# EAGLE board avocado-rev01.OLD (EAGLE 9.3.1)
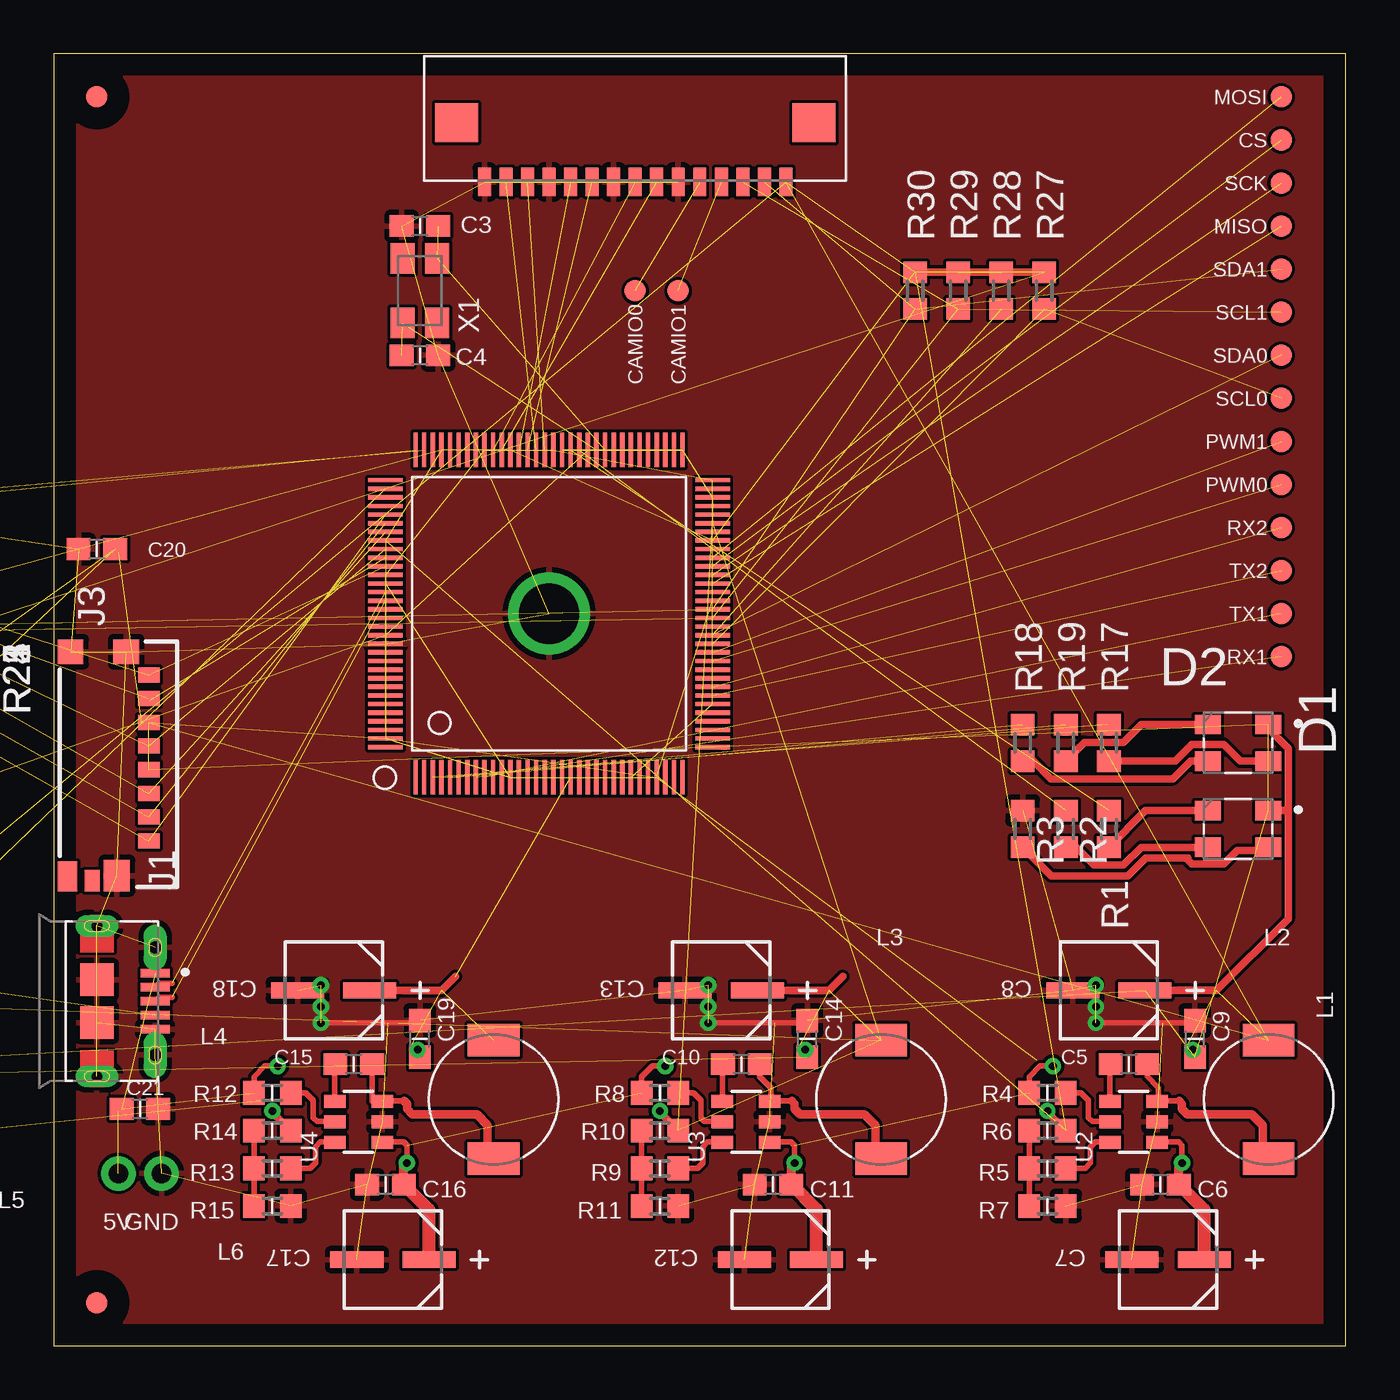
[diagram p0: board, top side]
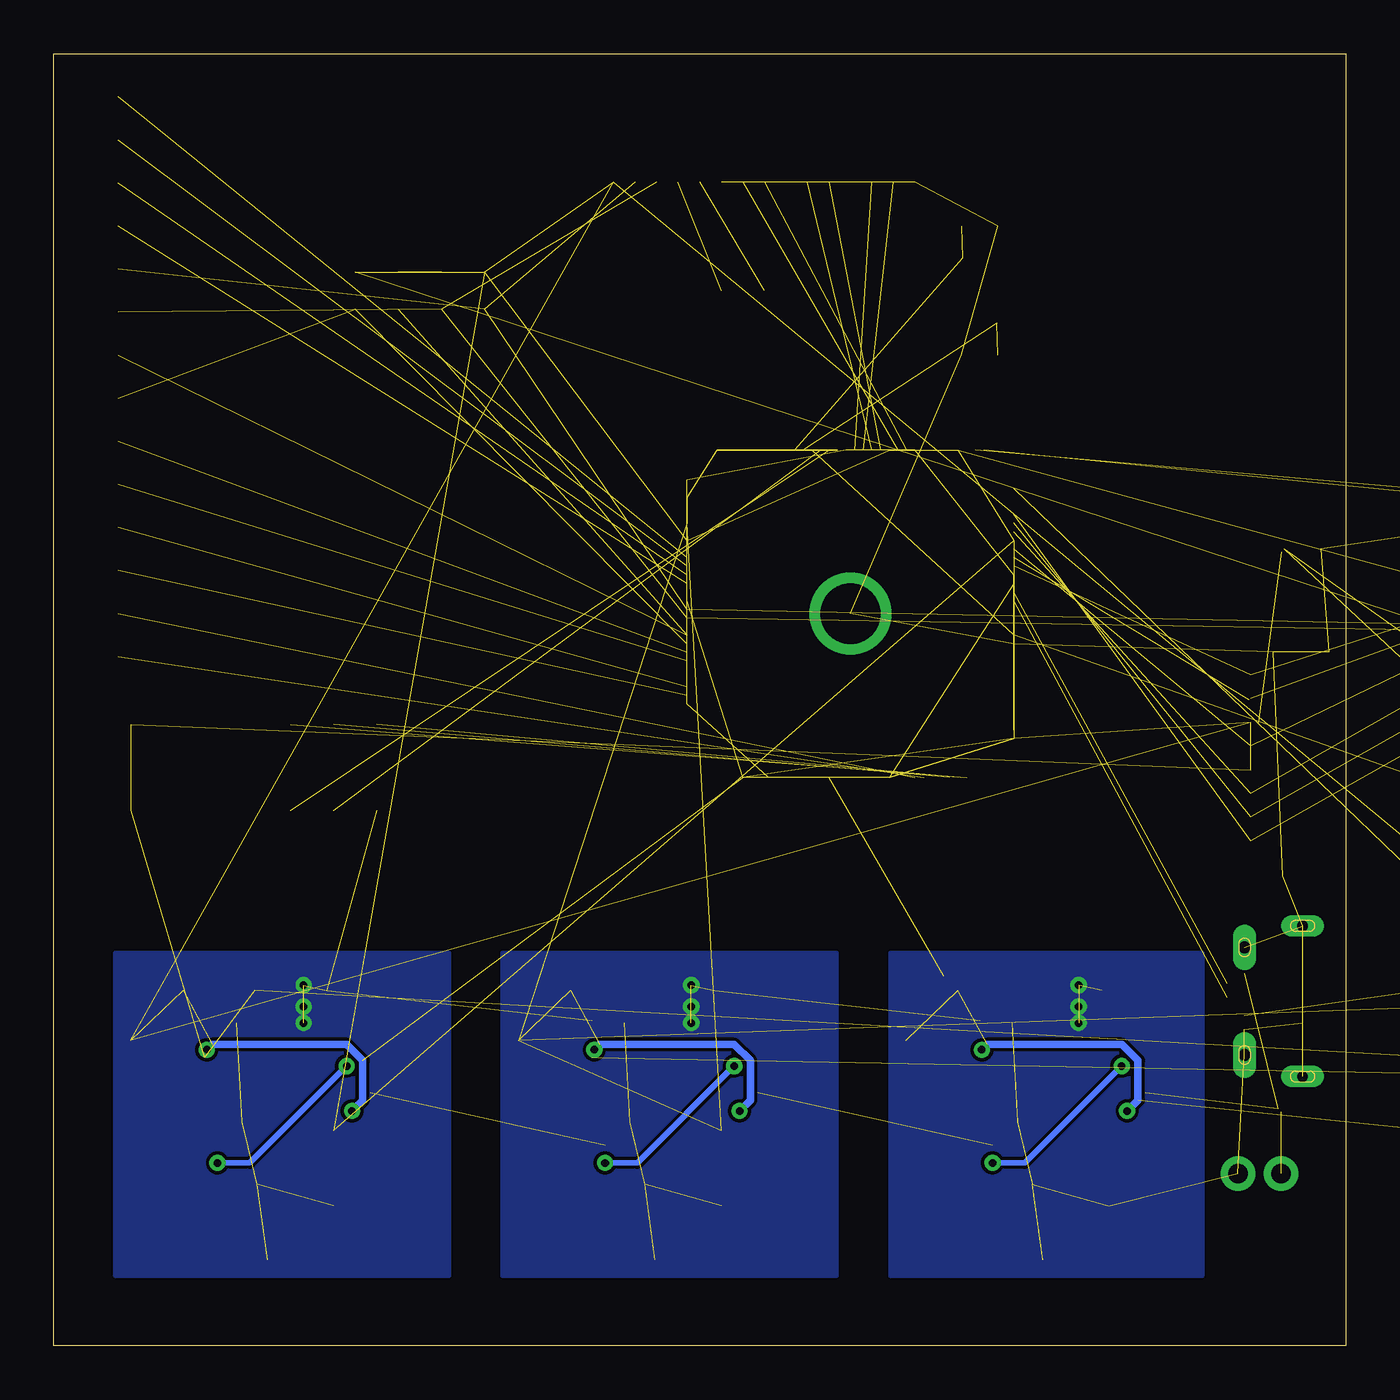
[diagram p1: board, bottom side, seen from below]

Size 60 x 60 mm. Coordinates in mm from the lower left corner, seen from the top.
Outline: 0,0 60,0 60,60 0,60 0,0
Copper layers (1*16): Top 0.035mm / dielectric 1.5mm / Bottom 0.035mm
Design rules "default": minimum track width 6mil, minimum drill 0.35mm, track to track 6mil, track to pad 6mil, pad to pad 6mil, via to via 6mil, smd to smd 6mil, copper to edge 40mil, drill to drill 6mil, minimum pad ring 10mil, minimum via ring 8mil, stop-mask expansion 4mil, vias tented up to drill 0mil, thermal gap 10mil
Net classes: 0 default: width 0.25 mm, drill 0.35 mm, clearance 0.15 mm; 3 power: width 0.35 mm, drill 0.35 mm, clearance 0.15 mm

## Footprints (pad centres in the part's own frame; a part is rotated, then mirrored left to right if it is on the bottom)
PAD = drill 0.9 pad 1.6: P$1 0,0
C0603 = smd 1.1 x 1: 1 -0.85,0; 2 0.85,0
CAP4.3X6.1 = smd 2.464 x 0.762: 1 -1.676,0; 2 1.676,0
TEST_TESTPOINT = smd 1 x 1: 1 0,0
JST-PH-2-SMT-RA = smd 1 x 4.6: 1 1,-3.7; 2 -1,-3.7 | smd 1.6 x 3.4: NC1 -3.4,1.5; NC2 3.4,1.5
LED_LL-R3528RGBC-008-B = smd 1.2 x 0.9: 1 -1.4,-0.85; 2 1.4,-0.85; 3 1.4,0.85; 4 -1.4,0.85
FIDUCIAL_1MM = smd 1 x 1: 1 0,0
AMPHENOL_10118194-0001LF = smd 0.4 x 1.35: 1 -1.3,2.7; 2 -0.65,2.7; 3 0,2.7; 4 0.65,2.7; 5 1.3,2.7 | drill 0.55 pad 0.65 long: S1 -2.5,2.7; S2 2.5,2.7 | drill 0.5 pad 0.775 long: S3 -3.5,0; S6 3.5,0 | smd 1.5 x 1.55: S4 -1,0; S5 1,0
MOLEX_0475710001 = smd 0.7 x 1: 1 3.55,1.415; 2 2.45,1.415; 3 1.35,1.415; 4 0.25,1.415; 5 -0.85,1.415; 6 -1.95,1.415; 7 -3.05,1.415; 8 -4.15,1.415 | smd 1.15 x 1.2: 9 -5.225,0.365; 10 -5.225,-2.225 | smd 1.4 x 0.9: 11 5.2,-2.375 | smd 1 x 0.7: 12 5.4,-1.225 | smd 1.45 x 1.2: 13 5.175,-0.075
B82462A4153K = smd 1.5 x 2.4: P$1 -2.75,0; P$2 2.75,0
686115148922 = smd 0.6 x 1.3: 1 7,2.95; 2 6,2.95; 3 5,2.95; 4 4,2.95; 5 3,2.95; 6 2,2.95; 7 1,2.95; 8 0,2.95; 9 -1,2.95; 10 -2,2.95; 11 -3,2.95; 12 -4,2.95; 13 -5,2.95; 14 -6,2.95; 15 -7,2.95 | smd 2 x 1.8: SHLD1 -8.3,0.2; SHLD2 8.3,0.2
R0603 = smd 1 x 1.1: 1 -0.85,0; 2 0.85,0
R0402 = smd 0.7 x 0.9: 1 -0.65,0; 2 0.65,0
R1206 = smd 1.6 x 1.803: 1 -1.422,0; 2 1.422,0
KMR2 = smd 1 x 1: 1 2,0.8; 2 2,-0.8; 3 -2,0.8; 4 -2,-0.8
QFP-128 = smd 0.2 x 1.6: 1 -6.2,-7.6; 2 -5.8,-7.6; 3 -5.4,-7.6; 4 -5,-7.6; 5 -4.6,-7.6; 6 -4.2,-7.6; 7 -3.8,-7.6; 8 -3.4,-7.6; 9 -3,-7.6; 10 -2.6,-7.6; 11 -2.2,-7.6; 12 -1.8,-7.6; 13 -1.4,-7.6; 14 -1,-7.6; 15 -0.6,-7.6; 16 -0.2,-7.6; 17 0.2,-7.6; 18 0.6,-7.6; 19 1,-7.6; 20 1.4,-7.6; 21 1.8,-7.6; 22 2.2,-7.6; 23 2.6,-7.6; 24 3,-7.6; 25 3.4,-7.6; 26 3.8,-7.6; 27 4.2,-7.6; 28 4.6,-7.6; 29 5,-7.6; 30 5.4,-7.6; 31 5.8,-7.6; 32 6.2,-7.6; 65 6.2,7.6; 66 5.8,7.6; 67 5.4,7.6; 68 5,7.6; 69 4.6,7.6; 70 4.2,7.6; 71 3.8,7.6; 72 3.4,7.6; 73 3,7.6; 74 2.6,7.6; 75 2.2,7.6; 76 1.8,7.6; 77 1.4,7.6; 78 1,7.6; 79 0.6,7.6; 80 0.2,7.6; 81 -0.2,7.6; 82 -0.6,7.6; 83 -1,7.6; 84 -1.4,7.6; 85 -1.8,7.6; 86 -2.2,7.6; 87 -2.6,7.6; 88 -3,7.6; 89 -3.4,7.6; 90 -3.8,7.6; 91 -4.2,7.6; 92 -4.6,7.6; 93 -5,7.6; 94 -5.4,7.6; 95 -5.8,7.6; 96 -6.2,7.6 | smd 1.6 x 0.2: 33 7.6,-6.2; 34 7.6,-5.8; 35 7.6,-5.4; 36 7.6,-5; 37 7.6,-4.6; 38 7.6,-4.2; 39 7.6,-3.8; 40 7.6,-3.4; 41 7.6,-3; 42 7.6,-2.6; 43 7.6,-2.2; 44 7.6,-1.8; 45 7.6,-1.4; 46 7.6,-1; 47 7.6,-0.6; 48 7.6,-0.2; 49 7.6,0.2; 50 7.6,0.6; 51 7.6,1; 52 7.6,1.4; 53 7.6,1.8; 54 7.6,2.2; 55 7.6,2.6; 56 7.6,3; 57 7.6,3.4; 58 7.6,3.8; 59 7.6,4.2; 60 7.6,4.6; 61 7.6,5; 62 7.6,5.4; 63 7.6,5.8; 64 7.6,6.2; 97 -7.6,6.2; 98 -7.6,5.8; 99 -7.6,5.4; 100 -7.6,5; 101 -7.6,4.6; 102 -7.6,4.2; 103 -7.6,3.8; 104 -7.6,3.4; 105 -7.6,3; 106 -7.6,2.6; 107 -7.6,2.2; 108 -7.6,1.8; 109 -7.6,1.4; 110 -7.6,1; 111 -7.6,0.6; 112 -7.6,0.2; 113 -7.6,-0.2; 114 -7.6,-0.6; 115 -7.6,-1; 116 -7.6,-1.4; 117 -7.6,-1.8; 118 -7.6,-2.2; 119 -7.6,-2.6; 120 -7.6,-3; 121 -7.6,-3.4; 122 -7.6,-3.8; 123 -7.6,-4.2; 124 -7.6,-4.6; 125 -7.6,-5; 126 -7.6,-5.4; 127 -7.6,-5.8; 128 -7.6,-6.2 | drill 2.8: P$1 0,0
TSOT26 = smd 0.6 x 1: 1 -0.95,-1.099; 2 0,-1.099; 3 0.95,-1.099; 4 0.95,1.099; 5 0,1.099; 6 -0.95,1.099
SOT-23 = smd 1.016 x 1.2: 1 -0.95,-1.06; 2 0.95,-1.06; 3 0,1.06
QFN40P600X600X80-49N = smd 0.85 x 0.2: 1 -2.95,2.2; 2 -2.95,1.8; 3 -2.95,1.4; 4 -2.95,1; 5 -2.95,0.6; 6 -2.95,0.2; 7 -2.95,-0.2; 8 -2.95,-0.6; 9 -2.95,-1; 10 -2.95,-1.4; 11 -2.95,-1.8; 12 -2.95,-2.2; 25 2.95,-2.2; 26 2.95,-1.8; 27 2.95,-1.4; 28 2.95,-1; 29 2.95,-0.6; 30 2.95,-0.2; 31 2.95,0.2; 32 2.95,0.6; 33 2.95,1; 34 2.95,1.4; 35 2.95,1.8; 36 2.95,2.2 | smd 0.2 x 0.85: 13 -2.2,-2.95; 14 -1.8,-2.95; 15 -1.4,-2.95; 16 -1,-2.95; 17 -0.6,-2.95; 18 -0.2,-2.95; 19 0.2,-2.95; 20 0.6,-2.95; 21 1,-2.95; 22 1.4,-2.945; 23 1.8,-2.95; 24 2.2,-2.95; 37 2.2,2.95; 38 1.8,2.95; 39 1.4,2.95; 40 1,2.95; 41 0.6,2.95; 42 0.2,2.95; 43 -0.2,2.95; 44 -0.6,2.95; 45 -1,2.95; 46 -1.4,2.95; 47 -1.8,2.95; 48 -2.2,2.95 | smd 4.15 x 4.15: 49 0,0
3.2X2-4 = smd 1.4 x 1.1: P$1 -1.5,0.8; P$2 1.5,0.8; P$3 1.5,-0.8; P$4 -1.5,-0.8
XTAL-5X1.9 = smd 1.3 x 2.2: P$1 -2.1,0; P$2 2.1,0

## Placement (x,y rotation side)
5V  PADTH  [PAD]  3,8 0 top
C1  [C0603]  -22,39 90 top  (outside the outline)
C2  [C0603]  -18,39 90 top  (outside the outline)
C3  [C0603]  17,52 180 top
C4  [C0603]  17,46 0 top
C5  1u  [C0603]  49.93,13.08 0 top
C6  100n  [C0603]  51.4,7.49 180 top
C7  22u  [CAP4.3X6.1]  51.75,4 180 top
C8  22u  [CAP4.3X6.1]  49,16.5 180 top
C9  100n  [C0603]  53,14.25 90 top
C10  1u  [C0603]  31.93,13.08 0 top
C11  100n  [C0603]  33.4,7.49 180 top
C12  22u  [CAP4.3X6.1]  33.75,4 180 top
C13  22u  [CAP4.3X6.1]  31,16.5 180 top
C14  100n  [C0603]  35,14.25 90 top
C15  1u  [C0603]  13.93,13.08 0 top
C16  100n  [C0603]  15.4,7.49 180 top
C17  22u  [CAP4.3X6.1]  15.75,4 180 top
C18  22u  [CAP4.3X6.1]  13,16.5 180 top
C19  100n  [C0603]  17,14.25 90 top
C20  10u  [C0603]  2,37 180 top
C21  10u  [C0603]  4,11 0 top
C22  10u  [C0603]  -25.6,18.8 180 top  (outside the outline)
C23  10u  [C0603]  -25.8,17.2 180 top  (outside the outline)
C24  10u  [C0603]  -25.6,15.8 180 top  (outside the outline)
C25  10u  [C0603]  -25.8,14.4 180 top  (outside the outline)
C26  10u  [C0603]  -26,12.6 180 top  (outside the outline)
C27  10u  [C0603]  -25.8,11.2 180 top  (outside the outline)
C28  10u  [C0603]  -25.6,9.4 180 top  (outside the outline)
C29  10u  [C0603]  -25.2,7.6 180 top  (outside the outline)
C30  10u  [C0603]  -18,8.6 180 top  (outside the outline)
C31  10u  [C0603]  -18.2,9.8 180 top  (outside the outline)
C32  10u  [C0603]  -18.4,11.2 180 top  (outside the outline)
C33  10u  [C0603]  -18.4,12.4 180 top  (outside the outline)
C34  10u  [C0603]  -18.2,13.8 180 top  (outside the outline)
C35  10u  [C0603]  -18.2,15 180 top  (outside the outline)
C36  10u  [C0603]  -18.2,16.2 180 top  (outside the outline)
C37  10u  [C0603]  -18.2,18.2 180 top  (outside the outline)
C38  10u  [C0603]  -18.2,19.4 180 top  (outside the outline)
C39  10u  [C0603]  -32.8,19.4 180 top  (outside the outline)
C40  10u  [C0603]  -33.6,17.4 180 top  (outside the outline)
C41  10u  [C0603]  -33.6,16.2 180 top  (outside the outline)
C42  10u  [C0603]  -33.6,15.2 180 top  (outside the outline)
C43  10u  [C0603]  -31.2,13.6 180 top  (outside the outline)
C44  10u  [C0603]  -32.2,9.8 180 top  (outside the outline)
C45  10u  [C0603]  -36.4,11.6 180 top  (outside the outline)
C46  1u  [C0603]  -36.6,9.6 180 top  (outside the outline)
C47  4u7  [C0603]  -33.2,7.8 180 top  (outside the outline)
C48  4u7  [C0603]  -33.4,5.8 180 top  (outside the outline)
C49  4u7  [C0603]  -33.4,4 180 top  (outside the outline)
C50  4u7  [C0603]  -33.8,2.4 180 top  (outside the outline)
C51  10u  [C0603]  -36.6,2.4 180 top  (outside the outline)
C52  10u  [C0603]  -36.6,4.4 180 top  (outside the outline)
C53  10u  [C0603]  -36.8,5.8 180 top  (outside the outline)
C54  1n  [C0603]  -40.6,8.8 180 top  (outside the outline)
C55  1n  [C0603]  -40.6,10.6 180 top  (outside the outline)
C56  4u7  [C0603]  -41.2,6.6 180 top  (outside the outline)
C57  4u7  [C0603]  -47.8,10.4 180 top  (outside the outline)
C58  1u  [C0603]  -45.4,14.6 180 top  (outside the outline)
C59  4u7  [C0603]  -45.2,17 180 top  (outside the outline)
C60  10u  [C0603]  -44.4,20.8 180 top  (outside the outline)
C61  10u  [C0603]  -40.4,19.6 180 top  (outside the outline)
C62  10u  [C0603]  -40.6,17.8 180 top  (outside the outline)
C63  10u  [C0603]  -40.6,16.6 180 top  (outside the outline)
C64  4u7  [C0603]  -40.6,15.2 180 top  (outside the outline)
C65  1u  [C0603]  -40.4,14 180 top  (outside the outline)
C66  1u  [C0603]  -40.4,12.6 180 top  (outside the outline)
C67  1u  [C0603]  -28,23.6 180 top  (outside the outline)
C68  1u  [C0603]  -36.6,1 180 top  (outside the outline)
CAMIO0  TEST_TESTPOINT  [TEST_TESTPOINT]  27,49 270 top
CAMIO1  TEST_TESTPOINT  [TEST_TESTPOINT]  29,49 270 top
CN1  [JST-PH-2-SMT-RA]  -67.6,-6.6 0 top  (outside the outline)
CS  TEST_TESTPOINT  [TEST_TESTPOINT]  57,56 180 top
D1  LL-R3528RGBC-008-B  [LED_LL-R3528RGBC-008-B]  55,24 180 top
D2  LL-R3528RGBC-008-B  [LED_LL-R3528RGBC-008-B]  55,28 180 top
FID1  FIDUCIAL  [FIDUCIAL_1MM]  2,58 0 top
FID2  FIDUCIAL  [FIDUCIAL_1MM]  2,2 0 top
GND  PADTH  [PAD]  5,8 0 top
J1  10118194-0001LF  [AMPHENOL_10118194-0001LF]  2,16 270 top
J3  0475710001  [MOLEX_0475710001]  3,27 270 top
L1  CALC  [B82462A4153K]  56.42,11.44 90 top
L2  CALC  [B82462A4153K]  38.42,11.44 90 top
L3  CALC  [B82462A4153K]  20.42,11.44 90 top
L4  2.2uH-DCR<0.1R-1.5A  [B82462A4153K]  -10.98,6.84 90 top  (outside the outline)
L5  2.2uH-DCR<0.1R-1.5A  [B82462A4153K]  -20.38,-0.76 90 top  (outside the outline)
L6  2.2uH-DCR<0.1R-1.5A  [B82462A4153K]  -10.18,-3.16 90 top  (outside the outline)
MISO  TEST_TESTPOINT  [TEST_TESTPOINT]  57,52 180 top
MOSI  TEST_TESTPOINT  [TEST_TESTPOINT]  57,58 180 top
P2  CONNECTOR-15686115148922  [686115148922]  27,57 180 top
PWM0  TEST_TESTPOINT  [TEST_TESTPOINT]  57,40 180 top
PWM1  TEST_TESTPOINT  [TEST_TESTPOINT]  57,42 180 top
R1  [R0603]  49,24 270 top
R2  [R0603]  47,24 270 top
R3  [R0603]  45,24 270 top
R4  100k  [R0603]  46.15,11.74 180 top
R5  59k  [R0603]  46.15,8.24 0 top
R6  CALC  [R0603]  46.15,9.99 180 top
R7  CALC  [R0603]  46.15,6.49 0 top
R8  100k  [R0603]  28.15,11.74 180 top
R9  59k  [R0603]  28.15,8.24 0 top
R10  CALC  [R0603]  28.15,9.99 180 top
R11  CALC  [R0603]  28.15,6.49 0 top
R12  100k  [R0603]  10.15,11.74 180 top
R13  59k  [R0603]  10.15,8.24 0 top
R14  CALC  [R0603]  10.15,9.99 180 top
R15  CALC  [R0603]  10.15,6.49 0 top
R16  0  [R0603]  -5,21 180 top  (outside the outline)
R17  [R0603]  49,28 270 top
R18  [R0603]  45,28 270 top
R19  [R0603]  47,28 270 top
R20  [R0603]  -6,17 180 top  (outside the outline)
R21  47k  [R0603]  -6,33 270 top  (outside the outline)
R22  47k  [R0603]  -4,33 270 top  (outside the outline)
R23  47k  [R0603]  -14,33 270 top  (outside the outline)
R24  47k  [R0603]  -12,33 270 top  (outside the outline)
R25  47k  [R0603]  -10,33 270 top  (outside the outline)
R26  47k  [R0603]  -8,33 270 top  (outside the outline)
R27  2k  [R0603]  46,49 270 top
R28  2k  [R0603]  44,49 270 top
R29  2k  [R0603]  42,49 270 top
R30  2k  [R0603]  40,49 270 top
R31  200K-1%  [R0402]  -35.8,32.8 0 top  (outside the outline)
R32  100R-1%  [R0402]  -35.8,35.2 0 top  (outside the outline)
R33  0R03  [R1206]  -69.4,-18 0 top  (outside the outline)
R34  47k  [R0402]  -40.4,37.4 0 top  (outside the outline)
R35  1K  [R0402]  -40.2,36 0 top  (outside the outline)
R36  1k  [R0402]  -39.8,34.4 0 top  (outside the outline)
R37  0R  [R0402]  -39.8,32.8 0 top  (outside the outline)
R38  0R  [R0402]  -43.4,32.6 0 top  (outside the outline)
R39  0R NC  [R0402]  -61.6,-12.4 0 top  (outside the outline)
RX1  TEST_TESTPOINT  [TEST_TESTPOINT]  57,32 180 top
RX2  TEST_TESTPOINT  [TEST_TESTPOINT]  57,38 180 top
SCK  TEST_TESTPOINT  [TEST_TESTPOINT]  57,54 180 top
SCL0  TEST_TESTPOINT  [TEST_TESTPOINT]  57,44 180 top
SCL1  TEST_TESTPOINT  [TEST_TESTPOINT]  57,48 180 top
SDA0  TEST_TESTPOINT  [TEST_TESTPOINT]  57,46 180 top
SDA1  TEST_TESTPOINT  [TEST_TESTPOINT]  57,50 180 top
SW1  SPST_TACT-KMR2  [KMR2]  -60.6,-8.4 0 top  (outside the outline)
TX1  TEST_TESTPOINT  [TEST_TESTPOINT]  57,34 180 top
TX2  TEST_TESTPOINT  [TEST_TESTPOINT]  57,36 270 top
U1  V3S  [QFP-128]  23,34 0 top
U2  AP65111A  [TSOT26]  50.15,10.4 90 top
U3  AP65111A  [TSOT26]  32.15,10.4 90 top
U4  AP65111A  [TSOT26]  14.15,10.4 90 top
U5  PMIC-LDO-XC6206P302MR(SOT23)  [SOT-23]  -37.4,25.4 0 top  (outside the outline)
U6  AXP209  [QFN40P600X600X80-49N]  -59,7.4 0 top  (outside the outline)
X1  [3.2X2-4]  17,49 270 top
X2  [XTAL-5X1.9]  -20,36 180 top  (outside the outline)

## Library data of the parts
5V CAMIO0 CAMIO1 CS FID1 FID2 GND MISO MOSI PWM0 PWM1 RX1 RX2 SCK SCL0 SCL1 SDA0 SDA1 TX1 TX2 = marius; X: X
C1-C68 R4-R16 X1 X2 = marius
CN1 SW1 = adafruit
D1 D2 = LL-R3528RGBC-008-B; AVAILABILITY: Unavailable; DESCRIPTION: LED; SMD; 3528, PLCC2; RGB; 3.5x2.8mm; 120°; Red lumin: 1; MF: Lucky Light; MP: LL-R3528RGBC-008-B; PACKAGE: PLCC-2 Lucky Light; PRICE: None
J1 = 10118194-0001LF; AVAILABILITY: Unavailable; DESCRIPTION: Micro Usb, 2.0 Type b, Rcpt, Smt; MF: Amphenol ICC; MP: 10118194-0001LF; PACKAGE: None; PRICE: None
J3 = 0475710001; AVAILABILITY: Unavailable; DESCRIPTION: Conn Micro SD Card HDR 8 POS 1.1mm Solder RA SMD Embossed T/R 0.5A/Contact; MF: Molex; MP: 0475710001; PACKAGE: None; PRICE: None
L1-L6 = marius; MOUSER: 871-B82462A4153K; MPN: B82462A4153K
P2 = marius; FARNEL: 2470725; MPN: 686115148922
R1-R3 R17-R39 = resistor
U1 = marius; MPN: V3s
U2-U4 = marius; MPN: AP65111AWU-7
U5 = PMIC-LDO-XC6206P302MR_SOT23_; AVAILABILITY: N/A; DESCRIPTION: N/A; MF: Torex; MP: XC6206P302MR; PACKAGE: SOT-23-3 Torex; PRICE: None
U6 = AXP209; AVAILABILITY: Unavailable; DESCRIPTION: IC; MF: X-Powers Limited; MP: AXP209; PACKAGE: Package Analog Devices; PRICE: None

## Nets
1V2 [power]: C18.1 C19.1 C24.1 C25.1 C26.1 C27.1 C28.1 C29.1 C30.1 C31.1 C32.1 L3.P$2 R14.1 U1.19 U1.20 U1.21 U1.25 U1.26 U1.38 U1.47 U1.51 U1.56 U1.58 U1.64 U1.80 U1.88 U1.108 U1.126
1V8 [power]: C13.1 C14.1 C33.1 C34.1 C35.1 C36.1 L2.P$2 R10.1 U1.59 U1.60 U1.61 U1.62 U1.65 U1.66 U1.67 U1.68 U1.69 U1.70 U1.72 U1.79
3V: C22.1 C23.1 U1.76 U1.115 U5.2
3V3 [power]: C8.1 C9.1 C20.1 C37.1 C38.1 C39.1 C40.1 C41.1 C42.1 C43.1 C44.1 C45.1 D1.1 D2.1 J3.4 J3.6 L1.P$2 P2.15 R6.1 R16.2 R20.1 R21.2 R22.2 R23.2 R24.2 R25.2 R26.2 R27.1 R28.1 R29.1 R30.1 U1.12 U1.29 U1.50 U1.57 U1.85 U1.93 U1.104 U1.109 U1.127 U5.3
ACIN-5V: C52.2 R39.2 U6.32 U6.33
CAM_IO0: CAMIO0.1 P2.11
CAM_IO1: CAMIO1.1 P2.12
CHGLED: U6.36
DC21V2 [power]: C55.2 C61.2 L4.P$2 U6.10
DC31V2 [power]: C54.2 C62.2 L5.P$2 U6.17
GND: C1.2 C2.2 C3.2 C4.2 C6.2 C7.2 C8.2 C9.2 C11.2 C12.2 C13.2 C14.2 C16.2 C17.2 C18.2 C19.2 C20.2 C21.2 C22.2 C23.2 C24.2 C25.2 C26.2 C27.2 C28.2 C29.2 C30.2 C31.2 C32.2 C33.2 C34.2 C35.2 C36.2 C37.2 C38.2 C39.2 C40.2 C41.2 C42.2 C43.2 C44.2 C45.2 C46.2 C47.2 C48.2 C49.2 C50.2 C51.1 C52.1 C53.1 C54.1 C55.1 C56.2 C57.2 C59.2 C60.2 C61.1 C62.1 C63.1 C64.1 C65.1 C66.1 C67.1 C68.2 CN1.2 GND.P$1 J1.5 J1.S1 J1.S2 J1.S3 J1.S4 J1.S5 J1.S6 J3.9 J3.10 J3.13 P2.1 P2.4 P2.7 P2.10 R3.1 R7.2 R11.2 R15.2 R31.1 R32.1 R35.2 SW1.3 U1.116 U1.P$1 U2.2 U3.2 U4.2 U5.1 U6.9 U6.16 U6.22 U6.46 U6.49
IPSOUT: C49.1 C53.2 C59.1 C60.1 C63.2 C64.2 U6.7 U6.13 U6.14 U6.21 U6.34 U6.35 U6.40 U6.44
LDO1V8: C48.1 U6.41
LDO3V: C47.1 U6.12
LDO13V3: C46.1 U6.28
LDO42V8: C50.1 U6.11
LED0: R18.1 U1.4
LED1: R19.1 U1.5
LED2: R17.1 U1.3
LED3: R1.1 U1.78
LED4: R2.1 U1.77
N$1: C4.1 U1.75 X1.P$3
N$2: C3.1 U1.74 X1.P$1
N$3: C1.1 U1.95 X2.P$2
N$4: C2.1 U1.96 X2.P$1
N$5: J1.2 U1.110
N$6: J1.3 U1.111
N$7: L4.P$1 U6.8
N$8: L6.P$1 U6.45
N$9: D2.2 R19.2
N$10: D2.3 R18.2
N$11: D2.4 R17.2
N$12: D1.2 R1.2
N$13 [power]: R16.1 U1.98
N$14: D1.3 R2.2
N$15: R5.2 U2.6
N$16: C5.2 L1.P$1 U2.3
N$17: R5.1 R6.2 R7.1
N$18: C5.1 U2.4
N$19: R4.1 U2.5
N$20: R9.2 U3.6
N$21: C10.2 L2.P$1 U3.3
N$22: R9.1 R10.2 R11.1
N$23: C10.1 U3.4
N$24: D1.4 R3.2
N$25: R8.1 U3.5
N$26: L5.P$1 U6.15
N$27: R13.2 U4.6
N$28: C15.2 L3.P$1 U4.3
N$29: R13.1 R14.2 R15.1
N$30: C15.1 U4.4
N$31: R12.1 U4.5
N$32: R34.1
N$34: U1.97
N$40: U6.27
N$42: U1.73
N$43: U1.71
N$44: U1.63
N$47: TX2.1 U1.39
N$48: RX2.1 U1.40
N$49: R27.2 SCL0.1 U1.45
N$50: R28.2 SDA0.1 U1.46
N$51: C67.2 R34.2 U6.25
N$52: R37.1 U6.1
N$53: MISO.1 U1.52
N$54: SCK.1 U1.53
N$55: CS.1 U1.54
N$56: MOSI.1 U1.55
N$57: PWM0.1 U1.43
N$58: PWM1.1 U1.44
N$59: TX1.1 U1.9
N$60: RX1.1 U1.8
N$62: C56.1 C58.1 L6.P$2 R33.1 U6.43
N$64: R38.1 U6.2
N$65: P2.2 U1.82
N$66: P2.3 U1.81
N$67: R32.2 U6.37
N$68: P2.5 U1.84
N$69: P2.6 U1.83
N$70: P2.8 U1.87
N$72: P2.9 U1.86
N$73: R31.2 U6.23
N$75: C68.1 R36.1 U6.47
N$76: R35.1 U6.4
N$78: C66.2 U6.24
N$79: C65.2 U6.26
N$81: R36.2 SW1.4
NMI_N: U6.48
SCL: P2.13 R29.2 R38.2 SCL1.1 U1.48
SDA: P2.14 R30.2 R37.2 SDA1.1 U1.49
SDC0_CLK: J3.5 R26.1 U1.105
SDC0_CMD: J3.3 R25.1 U1.103
SDC0_D0: J3.7 R21.1 U1.106
SDC0_D1: J3.8 R22.1 U1.107
SDC0_D2: J3.1 R23.1 U1.101
SDC0_D3: J3.2 R24.1 U1.102
USB0_DRV: U6.6
USB-ID: J1.4 R20.2
USBVBUS: C51.2 R39.1 U6.31
VBAT: C57.1 C58.2 CN1.1 R33.2 U6.38 U6.39 U6.42
VCC: 5V.P$1 C6.1 C7.1 C11.1 C12.1 C16.1 C17.1 C21.1 J1.1 R4.2 R8.2 R12.2 U2.1 U3.1 U4.1

## Tracks (layer width: path | path; a pad name or v marks a point on that pad's centre or on a via)
1V2  (via drill 0.35)  (26 unrouted)
  Top 0.35: R14.1 10.15,10.84 v10.15,10.9 | C19.1 17,13.64 v16.9,13.74 | 18.65,17.15 18,16.5 C18.1
  Bottom 0.35: v10.15,10.9 9.65,11.4 9.65,13.24 10.4,13.99 16.65,13.99 v16.9,13.74
  pour Top (rank 2): 16.15,10.99 21.15,10.99 21.15,18.24 16.15,18.24
1V8  (via drill 0.35)  (32 unrouted)
  Top 0.35: R10.1 28.15,10.84 v28.15,10.9 | C14.1 35,13.64 v34.9,13.74 | 36.65,17.15 36,16.5 C13.1
  Bottom 0.35: v28.15,10.9 27.65,11.4 27.65,13.24 28.4,13.99 34.65,13.99 v34.9,13.74
  pour Top (rank 2): 34.15,10.99 39.15,10.99 39.15,18.24 34.15,18.24
3V  (4 unrouted)
3V3  (via drill 0.35)  (66 unrouted)
  Top 0.35: R6.1 46.15,10.84 v46.15,10.9 | C9.1 53,13.64 v52.9,13.74 | C8.1 54,16.5 57.33,19.83 57.33,25 | D2.1 56.4,28.66 57.33,27.74 57.33,25 | D1.1 57.18,24.85 57.33,25 | R27.1 R30.1 | J3.6 4.05,28.95 | 3,36.85 C20.1
  Bottom 0.35: v46.15,10.9 45.65,11.4 45.65,13.24 46.4,13.99 52.65,13.99 v52.9,13.74
  pour Top (rank 2): 52.15,10.99 57.15,10.99 57.15,18.24 52.15,18.24
ACIN-5V  (3 unrouted)
CAM_IO0  (1 unrouted)
CAM_IO1  (1 unrouted)
DC21V2  (3 unrouted)
DC31V2  (3 unrouted)
GND  (via drill 0.35)  (104 unrouted)
  Top 0.25: C9.2 52.9,15 51.5,15 51.49,14.99 v48.4,14.99 | C14.2 34.9,15 33.5,15 33.49,14.99 v30.4,14.99 | C19.2 16.9,15 15.5,15 15.49,14.99 v12.4,14.99
  other vias: 48.4,16.74 48.4,15.74 30.4,16.74 30.4,15.74 12.4,16.74 12.4,15.74
  pour Top: 0,0 0,60 60,60 60,0
  pour Top: 41.65,3.24 41.65,18.24 51.65,18.24 51.65,3.24
  pour Bottom: 41.65,3.24 41.65,18.24 57.15,18.24 57.15,3.24
  pour Top: 23.65,3.24 23.65,18.24 33.65,18.24 33.65,3.24
  pour Bottom: 23.65,3.24 23.65,18.24 39.15,18.24 39.15,3.24
  pour Top: 6.65,3.24 6.65,18.24 15.65,18.24 15.65,3.24
  pour Bottom: 6.65,3.24 6.65,18.24 21.15,18.24 21.15,3.24
IPSOUT  (13 unrouted)
LDO1V8  (1 unrouted)
LDO3V  (1 unrouted)
LDO13V3  (1 unrouted)
LDO42V8  (1 unrouted)
LED0  (1 unrouted)
LED1  (1 unrouted)
LED2  (1 unrouted)
LED3  (1 unrouted)
LED4  (1 unrouted)
N$1  (2 unrouted)
N$2  (2 unrouted)
N$3  (2 unrouted)
N$4  (2 unrouted)
N$5  (1 unrouted)
  Top 0.25: J1.2 4.87,16.82 5.49,16.82
N$6  (1 unrouted)
  Top 0.25: J1.3 4.87,16.17 5.49,16.17
N$7  (1 unrouted)
N$8  (1 unrouted)
N$9
  Top 0.35: R19.2 47.87,28.02 49.69,28.02 50.51,28.85 D2.2
N$10
  Top 0.35: D2.3 52.8,27.15 51.97,26.32 46.31,26.32 45.49,27.15 R18.2
N$11
  Top 0.35: R17.2 52.09,27.15 52.86,27.93 54.34,27.93 55.11,27.15 D2.4
N$12
  Top 0.35: D1.2 50.7,24.85 R1.2
N$13  (1 unrouted)
N$14
  Top 0.35: D1.3 50.51,23.15 49.69,22.32 48.31,22.32 47.49,23.15 R2.2
N$15
  Top 0.25: R5.2 47.9,8.24 48.15,8.49 48.15,9.24 48.37,9.46 U2.6
N$16
  Top 0.25: C5.2 50.78,12.51 51.31,11.98 51.31,11.41 U2.3 52.28,11.36
  Top 0.4: L1.P$1 56.15,8.96 56.15,10.24 55.65,10.74 52.65,10.74 52.4,10.99 52.4,11.24 52.28,11.36
N$17
  Top 0.25: R7.1 R5.1 R6.2
N$18
  Top 0.25: 49.11,13.05 C5.1 49.05,13.05 U2.4
N$19
  Top 0.25: R4.1 47.7,11.74 48.05,11.39 48.05,10.59 48.23,10.41 U2.5
N$20
  Top 0.25: R9.2 29.9,8.24 30.15,8.49 30.15,9.24 30.37,9.46 U3.6
N$21
  Top 0.25: C10.2 32.78,12.51 33.31,11.98 33.31,11.41 U3.3 34.28,11.36
  Top 0.4: L2.P$1 38.15,8.96 38.15,10.24 37.65,10.74 34.65,10.74 34.4,10.99 34.4,11.24 34.28,11.36
N$22
  Top 0.25: R11.1 R9.1 R10.2
N$23
  Top 0.25: 31.11,13.05 C10.1 31.05,13.05 U3.4
N$24
  Top 0.35: D1.4 56.25,23 54.96,23 54.34,22.37 52.86,22.37 52.67,22.56 52.67,22.65 50.72,22.65 49.89,21.82 46.33,21.82 R3.2
N$25
  Top 0.25: R8.1 29.7,11.74 30.05,11.39 30.05,10.59 30.23,10.41 U3.5
N$26  (1 unrouted)
N$27
  Top 0.25: R13.2 11.9,8.24 12.15,8.49 12.15,9.24 12.37,9.46 U4.6
N$28
  Top 0.25: C15.2 14.78,11.35 U4.3 16.28,11.36
  Top 0.4: L3.P$1 20.15,8.96 20.15,10.24 19.65,10.74 16.65,10.74 16.4,10.99 16.4,11.24 16.28,11.36
N$29
  Top 0.25: R15.1 R13.1 R14.2
N$30
  Top 0.25: 13.11,13.05 C15.1 13.05,13.05 U4.4
N$31
  Top 0.25: R12.1 11.7,11.74 12.05,11.39 12.05,10.59 12.23,10.41 U4.5
N$47  (1 unrouted)
N$48  (1 unrouted)
N$49  (2 unrouted)
N$50  (2 unrouted)
N$51  (2 unrouted)
N$52  (1 unrouted)
N$53  (1 unrouted)
N$54  (1 unrouted)
N$55  (1 unrouted)
N$56  (1 unrouted)
N$57  (1 unrouted)
N$58  (1 unrouted)
N$59  (1 unrouted)
N$60  (1 unrouted)
N$62  (4 unrouted)
N$64  (1 unrouted)
N$65  (1 unrouted)
N$66  (1 unrouted)
N$67  (1 unrouted)
N$68  (1 unrouted)
N$69  (1 unrouted)
N$70  (1 unrouted)
N$72  (1 unrouted)
N$73  (1 unrouted)
N$75  (2 unrouted)
N$76  (1 unrouted)
N$78  (1 unrouted)
N$79  (1 unrouted)
N$81  (1 unrouted)
SCL  (4 unrouted)
SDA  (4 unrouted)
SDC0_CLK  (2 unrouted)
SDC0_CMD  (2 unrouted)
SDC0_D0  (2 unrouted)
  Top 0.25: J3.7 4.46,30
SDC0_D1  (2 unrouted)
SDC0_D2  (2 unrouted)
SDC0_D3  (2 unrouted)
USB-ID  (1 unrouted)
USBVBUS  (2 unrouted)
VBAT  (6 unrouted)
VCC  (via drill 0.35)  (5 unrouted)
  Top 0.25: R8.2 27.3,12.49 27.8,12.99 v28.4,12.99 | v34.4,8.49 34.4,9.3 34.24,9.46 U3.1 | R12.2 9.3,12.49 9.8,12.99 v10.4,12.99 | v16.4,8.49 16.4,9.3 16.24,9.46 U4.1 | R4.2 45.3,12.49 45.8,12.99 v46.4,12.99 | v52.4,8.49 52.4,9.3 52.24,9.46 U2.1
  Top 0.406: C16.1 16.25,8.34 v16.4,8.49 | C11.1 34.25,8.34 v34.4,8.49 | C6.1 52.25,8.34 v52.4,8.49
  Top 0.61: C21.1 3,10.85 | C17.1 17.43,6.31 C16.1 | C12.1 35.43,6.31 C11.1 | C7.1 53.43,6.31 C6.1
  Bottom 0.25: v28.4,12.99 32.9,8.49 v34.4,8.49 | v10.4,12.99 14.9,8.49 v16.4,8.49 | v46.4,12.99 50.9,8.49 v52.4,8.49
VIN
  pour Top (rank 2): 52.15,3.24 57.15,3.24 57.15,10.49 52.15,10.49
  pour Top (rank 2): 34.15,3.24 39.15,3.24 39.15,10.49 34.15,10.49
  pour Top (rank 2): 16.15,3.24 21.15,3.24 21.15,10.49 16.15,10.49